# Altium PCB PCB2.PcbDoc
Units mm, origin at the board's own origin, x right, y up, seen from the top; angles counter-clockwise.
Board outline 90 x 120 mm, 2 copper layers (Top Layer, Bottom Layer), stack 1.6 mm thick; 37 components, 27 nets, 115 pads, 67 vias.
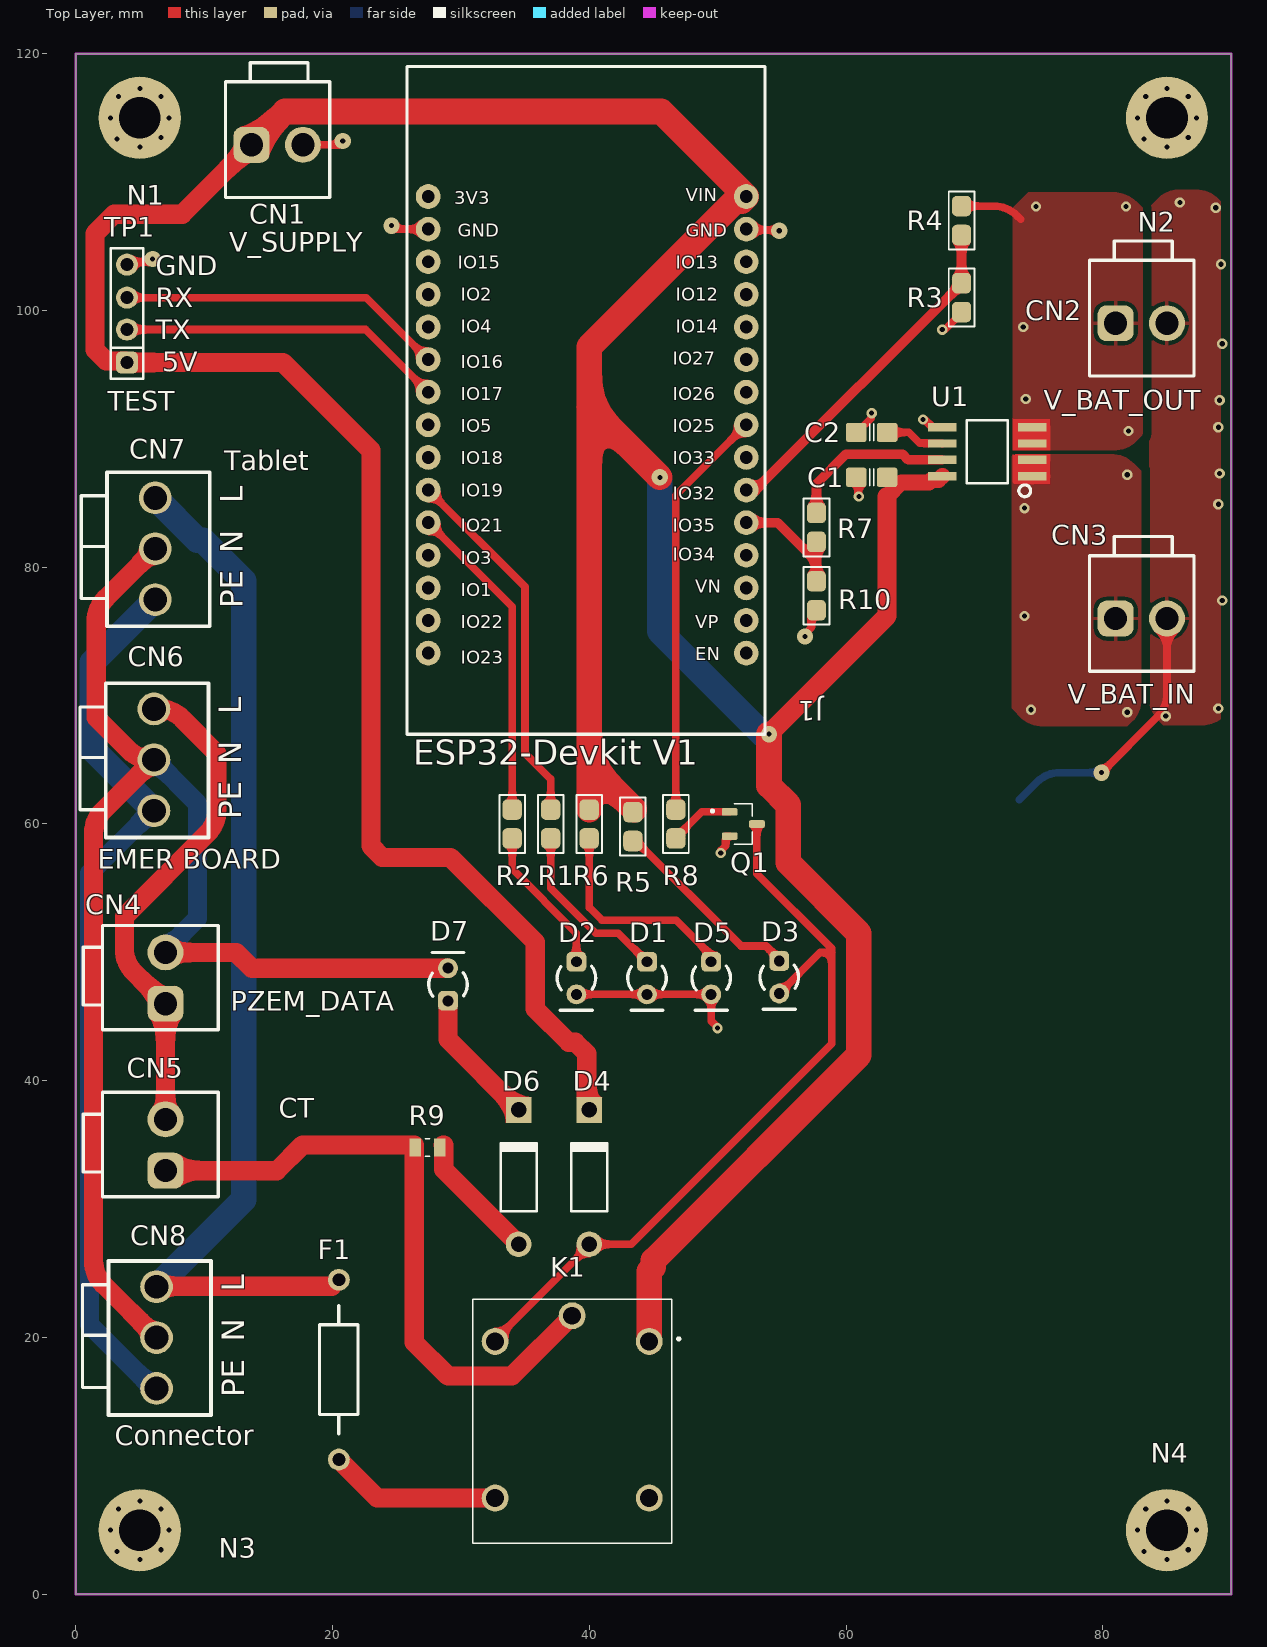
[diagram p0: Top Layer view]
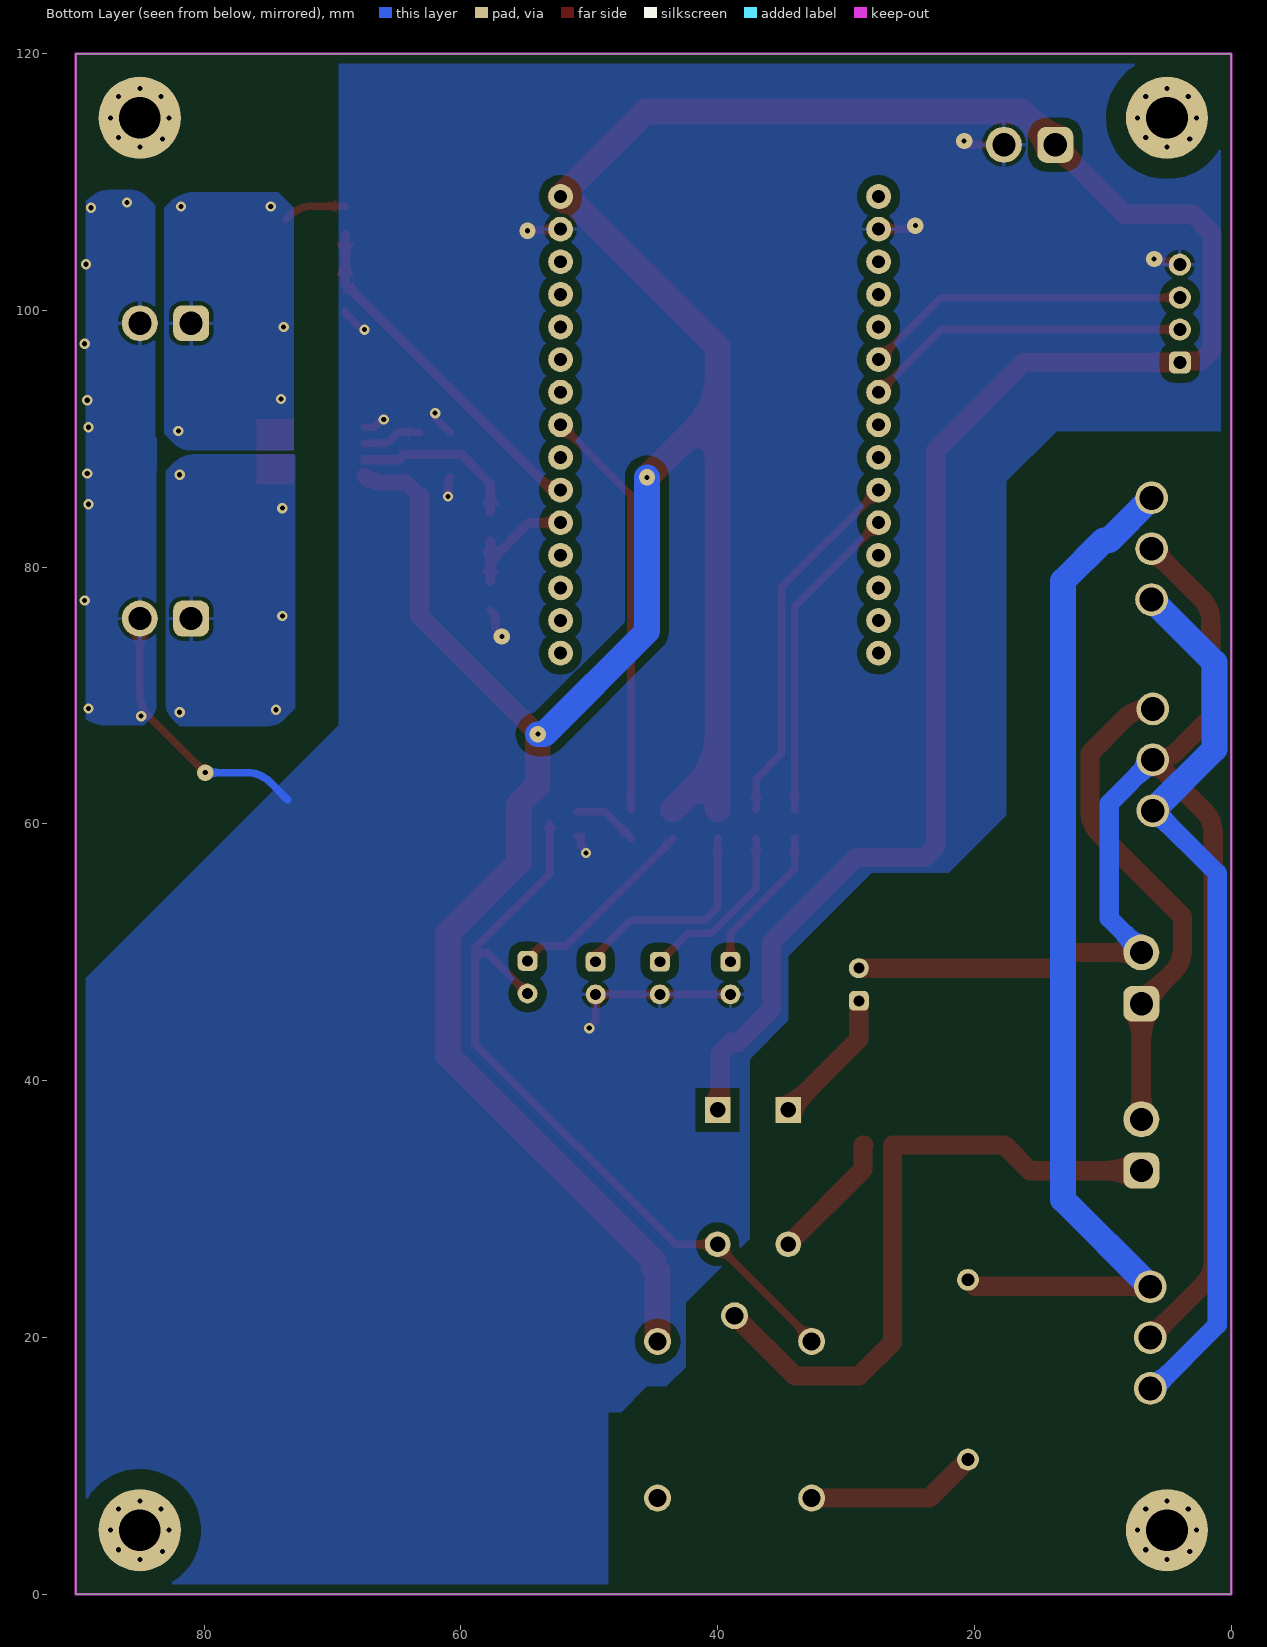
[diagram p1: Bottom Layer view, seen from below]

## Layer stack, top to bottom
Top Solder: solder mask 0.015, Solder Resist, Dk 3.5
Top Layer: signal copper 0.0356
Dielectric 1: dielectric 1.529, FR-4, Dk 4.8
Bottom Layer: signal copper 0.0356
Bottom Solder: solder mask 0.015, Solder Resist, Dk 3.5

## Board outline
0,0 0,120 90,120 90,0

## Design rules (kind name [scope] priority, off if disabled: settings)
BoardOutlineClearance [All] p1: gap=0.2 ignorepadtopadclearanceinfootprint=FALSE except(0.4: Arc-SplitBarrior Arc-SplitContinuation Track-SplitBarrior Track-SplitContinuation SMDPad-SplitBarrior SMDPad-SplitContinuation THPad-SplitBarrior THPad-SplitContinuation Via-SplitBarrior Via-SplitContinuation Fill-SplitBarrior Fill-SplitContinuation Poly-SplitBarrior Poly-SplitContinuation Region-SplitBarrior Region-SplitContinuation Text-SplitBarrior Text-SplitContinuation)
Clearance PolygonGND [InNet('GND')and not (IsVia or IsPad or IsTrack or IsArc)] p1: gap=0.7 ignorepadtopadclearanceinfootprint=FALSE except(0: Arc-Hole Track-Hole SMDPad-Hole THPad-Hole Via-Hole Fill-Hole Poly-Hole Region-Hole Text-Hole)
Clearance PadClearance [IsPad] p2: gap=0.2 ignorepadtopadclearanceinfootprint=FALSE except(0: Arc-Hole Track-Hole SMDPad-Hole THPad-Hole Via-Hole Fill-Hole Poly-Hole Region-Hole Text-Hole)
Clearance [All] p3: gap=0.2 ignorepadtopadclearanceinfootprint=FALSE except(0: Arc-Hole Track-Hole SMDPad-Hole THPad-Hole Via-Hole Fill-Hole Poly-Hole Region-Hole Text-Hole)
ComponentClearance [All] p1: gap=0.025 collisioncheckmode=3 verticalgap=0.1 showdistances=FALSE
Height [All] p1: minheight=0 maxheight=300 prefheight=12.7
HoleSize [All] p1: absolutevalues=TRUE maxlimit=6.3 minlimit=0.2 maxpercent=80.000 minpercent=20.000
MinimumAnnularRing [All] p1: minimumring=0.076
MinimumSolderMaskSliver [All] p1: minsoldermaskwidth=0.1
PolygonConnect ViaConnect [IsVia] p1: connectstyle=Direct reliefconductorwidth=0.254 reliefentries=4 polygonreliefangle="90 Angle" airgapwidth=0.254
PolygonConnect [All] p2: connectstyle=Relief reliefconductorwidth=0.3 reliefentries=4 polygonreliefangle="90 Angle" airgapwidth=0.3
RoutingVias [All] p1: holewidth=0.4 width=0.8 viastyle="Through Hole" minholewidth=0.3 minwidth=0.5 maxholewidth=0.711 maxwidth=1.27
SilkToSilkClearance [All] p1: silktosilkclearance=0.1
SilkToSolderMaskClearance [IsPad] p1: minsilkscreentomaskgap=0.1 clearancetoexposedcopper=TRUE
SolderMaskExpansion "Via Tenting" [IsVia] p1: expansion=-1 istentingtop=TRUE
SolderMaskExpansion [All] p2: expansion=0 istentingtop=FALSE
Width [All] p1: maxlimit=2.54 minlimit=0.089 preferedwidth=0.381
24 further rules are at their usual default settings.

## Components (designator, comment, footprint, x,y, rotation, side; value= is the part's Value field where it differs from the comment)
C1 "100n" CAPC2012X135N 62,87 r0 top
C2 "100n" CAPC2012X135N 62,90.5 r180 top
CN1 "V_SUPPLY" "Header 2 pin molex" 13.7,112.9 r0 top
CN2 "V_BAT_OUT" "Header 2 pin molex" 81,99 r0 top
CN3 "V_BAT_IN" "Header 2 pin molex" 81,76 r0 top
CN4 "PZEM_DATA" "Header 2 pin molex" 7,46 r90 top
CN5 "CT" "Header 2 pin molex" 7,33 r90 top
CN6 "EMER BOARD" "CON 3P 3.8mm" 6.1,68.96 r270 top
CN7 "Tablet" "CON 3P 3.8mm" 6.2,85.4 r270 top
CN8 "Connector" "CON 3P 3.8mm" 6.3,23.96 r270 top
D1 "LED" "LED GREEN" 44.5,48 r180 top
D2 "LED" "LED GREEN" 39,48 r180 top
D3 "LED" "LED GREEN" 54.8,48.07 r180 top
D4 "Diode 1N4007" DO-41 40,32.5 r90 top
D5 "LED" "LED GREEN" 49.5,48 r180 top
D6 "Diode 1N4007" DO-41 34.5,32.5 r90 top
D7 "LED_AC" "LED ORANGE" 29,47.5 r0 top
F1 "36FG(L)R" "Micro Fuse - L14mm" 20.5,17.5 r270 top value="1A, 250Vac"
J1 "ESP32DEVKITV1" ESP32-DEVKITV1_3D 41,86 r270 top locked
K1 "HRS4-S_DC6V" HRS4SDC5V 39,13.5 r270 top
N1 "M3" "M3 hole" 5,115 r0 top
N2 "M3" "M3 hole" 85,115 r0 top
N3 "M3" "M3 hole" 5,5 r0 top
N4 "M3" "M3 hole" 85,5 r0 top
Q1 "MMBT2222ALT1G" SOT95P237X111-3N 52,60 r0 top
R1 "330R" "0805 Modificado" 37,60 r270 top
R2 "330R" "0805 MODIFICADO" 34,60 r270 top
R3 "7K5" "0805 MODIFICADO" 69,101 r270 top
R4 "30K" "0805 MODIFICADO" 69,107 r270 top
R5 "330R" "0805 MODIFICADO" 43.4,59.8 r270 top
R6 "1K" "0805 Modificado" 40,60 r270 top
R7 "1K" "0805 Modificado" 57.7,83.1 r90 top
R8 "5k" "0805 MODIFICADO" 46.75,60 r270 top
R9 "56k" RESC2012X60N 27.4,34.8 r0 top
R10 "2K" "0805 Modificado" 57.7,77.775 r90 top
TP1 "TEST" "1x4P Test PIN" 4,98.485 r90 top
U1 "ACS712ELCTR-05B-T" SOIC127P600X175-8N 71,89 r180 top

## Footprints (in the part's own frame and the unit in brackets; to place one, negate y for a bottom-side part, rotate by r counter-clockwise, add the part's x,y. Pads: shape width x height; smd on the part's side, far side on the other; paste and mask are expansions set on the pad)
"1x4P Test PIN" [mm] "Connector Header, Single-row 4-position, 0.100\" pitch"
  rrect50% 1.72x1.72 hole 1.02: 1(-2.54,0)
  round 1.72 hole 1.02: 2(0.025,0) 3(2.515,0) 4(5.08,0)
  silkscreen extent -3.81,-1.27 6.35,1.27, body extent -3.69,-1.15 6.23,1.15, height 5
"0805 Modificado" [mm] "Chip Resistor, Empaque 0805"
  rrect50% 1.6x1.5 smd: 1(-1.125,0) 2(1.125,0)
  silkscreen extent -2.25,-1 2.25,1, body extent -1,-0.62 1,0.62, height 0.78
"0805 MODIFICADO" [mm] "Chip Resistor, Empaque 0805"
  rrect50% 1.6x1.5 smd: 1(-1.125,0) 2(1.125,0)
  silkscreen extent -2.25,-1 2.25,1, body extent -1,-0.62 1,0.62, height 0.78
CAPC2012X135N [mm] "Chip Capacitor, Body 2.0x1.2mm, EIA 0805, IPC Medium Density"
  round 0.254 on Mech15: 0(0,0)
  rrect25% 1.6x1.5 smd: 1(-1.2,0) 2(1.2,0)
  Top Layer pour cut-out: -0.675,0.7 -0.475,0.9 0.475,0.9 0.675,0.7 0.675,-0.7 0.475,-0.9 -0.475,-0.9 -0.675,-0.7
  silkscreen extent -0.15,-0.65 0.15,0.65, body extent -1.1,-0.72 1.1,0.73, height 1.34
"CON 3P 3.8mm" [mm]
  round 2.55 hole 1.85: 1(0,0) 2(3.96,0)
  round 2.55 hole 1.85 copper offset 0,0: 3(7.92,0.001)
  silkscreen extent -2,-5.76 10,4.25, body extent -1.86,-5.5 9.9,4, height 14.4
DO-41 [mm] "Diode, Axial; Body 5.2 x 2.7 mm (LxDia. max), Lead Dia. 0.86 mm (max)"
  round 2 hole 1.2: 1(-5.23,0)
  rect 2x2 hole 1.2: 2(5.23,0)
  silkscreen extent -2.65,-1.4 2.75,1.4, body extent -5.51,-1.34 5.51,1.4, height 2.73
ESP32-DEVKITV1_3D [mm]
  round 1.93 hole 1: 1(-22.87,-13.54) 2(-20.33,-13.54) 3(-17.79,-13.54) 4(-15.25,-13.54) 5(-12.71,-13.54) 6(-10.17,-13.54) 7(-7.63,-13.54) 8(-5.09,-13.54) 9(-2.55,-13.54) 10(-0.01,-13.54) 11(2.53,-13.54) 12(5.07,-13.54) 13(7.61,-13.54) 14(10.15,-13.54) 15(12.69,-13.54) 16(12.69,11.23) 17(10.15,11.23) 18(7.61,11.23) 19(5.07,11.23) 20(2.53,11.23) 21(-0.01,11.23) 22(-2.55,11.23) 23(-5.09,11.23) 24(-7.63,11.23) 25(-10.17,11.23) 26(-12.71,11.23) 27(-15.25,11.23) 28(-17.79,11.23) 29(-20.33,11.23) 30(-22.87,11.23)
  silkscreen extent -33,-15.2 19,12.7, body extent -33,-15.14 17.93,13.36, height 12.75
"Header 2 pin molex" [mm]
  rrect50% 2.8x2.8 hole 1.8: 1(0,0)
  round 2.8 hole 1.8: 2(4,0)
  silkscreen extent -2.03,-4.11 6.1,6.4, body extent -1.9,-3.95 5.9,5.55, height 14.4
HRS4SDC5V [mm]
  round 2.1 hole 1.4: 1(-6.2,5.675) 2(6,5.675) 3(6,-6.325) 4(-6.2,-6.325) 5(-8.2,-0.325)
  silkscreen extent -9.5,-8.08 9.5,8.07, body extent -9.5,-8.08 9.5,7.42, height 16.1
"LED GREEN" [mm]
  round 1.55 hole 0.85: 1(0,1.27)
  rrect50% 1.55x1.55 hole 0.85: 2(0,-1.27)
  silkscreen extent -1.5,-0.94 1.5,2.5, body extent -1.65,-1.66 1.65,1.64, height 7.01
"LED ORANGE" [mm]
  round 1.55 hole 0.85: 1(0,1.27)
  rrect50% 1.55x1.55 hole 0.85: 2(0,-1.27)
  silkscreen extent -1.5,-0.94 1.5,2.5, body extent -1.64,-1.66 1.65,1.55, height 6.48
"M3 hole" [mm]
  round 6.4 hole 3.25 mask+1.5: M(0,0)
  Top Layer pour cut-out: -0.132,4.78 -0.737,4.724 -1.295,4.597 -2.108,4.293 -2.818,3.885 -3.378,3.404 -3.834,2.869 -4.229,2.248 -4.497,1.616 -4.674,0.984 -4.769,0.305 -4.769,-0.353 -4.674,-0.965 -4.521,-1.575 -4.267,-2.134 -3.962,-2.692 -3.569,-3.175 -3.023,-3.721 -2.261,-4.229 -1.397,-4.572 -0.406,-4.75 0.457,-4.75 1.372,-4.572 2.248,-4.229 3.01,-3.721 3.556,-3.175 4.013,-2.591 4.42,-1.803 4.674,-0.965 4.775,-0.076 4.724,0.787 4.42,1.854 3.81,2.896 3.048,3.708 2.159,4.293 1.092,4.648
  Bottom Layer pour cut-out: -0.132,4.78 -0.737,4.724 -1.295,4.597 -2.108,4.293 -2.818,3.885 -3.378,3.404 -3.834,2.869 -4.229,2.248 -4.497,1.616 -4.674,0.984 -4.769,0.305 -4.769,-0.353 -4.674,-0.965 -4.521,-1.575 -4.267,-2.134 -3.962,-2.692 -3.569,-3.175 -3.023,-3.721 -2.261,-4.229 -1.397,-4.572 -0.406,-4.75 0.457,-4.75 1.372,-4.572 2.248,-4.229 3.01,-3.721 3.556,-3.175 4.013,-2.591 4.42,-1.803 4.674,-0.965 4.775,-0.076 4.724,0.787 4.42,1.854 3.81,2.896 3.048,3.708 2.159,4.293 1.092,4.648
  body extent -2.81,-2.8 2.79,2.8, height 4.92
"Micro Fuse - L14mm" [mm]
  round 1.7 hole 1: 1(-7,0) 2(7,0)
  silkscreen extent -5,-1.5 5,1.5, body extent -6.8,-1.9 6.8,1.9, height 3.9
RESC2012X60N [mm]
  rect 0.92x1.38 smd: 1(-0.955,0) 2(0.955,0)
  silkscreen extent -0.17,-0.68 0.17,0.68
SOIC127P600X175-8N [mm]
  rect 2.2x0.65 smd: 1(-3.5,1.905) 2(-3.5,0.635) 3(-3.5,-0.635) 4(-3.5,-1.905) 5(3.5,-1.905) 6(3.5,-0.635) 7(3.5,0.635) 8(3.5,1.905)
  silkscreen extent -3.38,-2.45 1.6,3.51, body extent -3,-2.45 3,2.45, height 1.75
SOT95P237X111-3N [mm]
  rrect50% 1.23x0.6 smd: 1(-1.06,0.95) 2(-1.06,-0.95) 3(1.06,0)
  silkscreen extent -2.5,-1.56 0.7,1.56, body extent -1.2,-1.45 1.2,1.45, height 0.91

## Part data
CN1 CN2 CN3 CN4 CN5: library part "Header LIGHT", "Connector 3.96MM 02 PIN WAFER STRAIGHTPIN (MALE)"
CN6 CN7 CN8: library part "Con 112002ST/RH 3.96mm 2P V-PLUG_1", "Connector 3.9mm. 3PINS WAFER STRAIGHT PIN (MALE)", Manufacturer=GTK, MPN=112002ST/RH, RMPN=RMELCCNT006, ComponentLink1Description="ES LINK", ComponentLink1URL=https://www.es.co.th/detail.asp?Prod=000709322, ESPN=0007-0932-2, M DESC="WAFER Connector 2 Pins,Pitch 3.96mm, Straight Type", RM DESC="Connector 3.9mm. 2PINS WAFER STRAIGHT PIN (MALE)"
D1 D2 D3 D5: library part "LED GREEN", "LED Lamp Round 5 mm, 50 mcd,Green Color Green Diffused Lens"
D4 D6: library part "Diode 1N4001", "1 Amp General Purpose Rectifier", Code_JEDEC=DO-204-AL, ComponentLink1Description="Manufacturer Link", ComponentLink1URL=http://www.fairchildsemi.com/, ComponentLink2Description=Datasheet, ComponentLink2URL=http://www.fairchildsemi.com/ds/1N%2F1N4001.pdf, DatasheetVersion=1998, LatestRevisionDate=17-Jul-2002, LatestRevisionNote="Re-released for DXP Platform.", PackageDescription="Diode, Axial; Body 5.2 x 2.7 mm (LxDia. max), Lead Dia. 0.86 mm (max)", PackageReference=DO-41, PackageVersion=Aug-1999, Published=8-Jun-2000, Publisher="Altium Limited"
D7: library part "LED ORANGE", "LED ORANGE for AC-signal display"
F1: library part "Fuse 36FG(L)R 1A On pcb", "Fuse Microfuse, 1A/250Vac, Fast Acting (Normal Blow) P/N : 36FG(L)R (SLEEK)", Manufacturer=SLEEK, RMPN=RMELCFUSA001, ComponentLink1Description="Link ES", ComponentLink1URL=https://www.es.co.th/detail.asp?prod=056200010, ComponentLink2Description=Datasheet, ComponentLink2URL=https://www.es.co.th/Schemetic/PDF/36FG-SLEEK.PDF, ESPN=0562-0001-0, MPN=36FG(L)R, Published=14-May-2014, Publisher="Cynetik Group", Revised="Zion Blue", RM DESC="Fuse หางหนู Microfuse, 1A/250Vac, Fast Acting (Normal Blow) P/N : 36FG(L)R (SLEEK)"
J1: "Dual core, Wi-Fi: 2.4 GHz up to 150 Mbits/s,BLE (Bluetooth Low Energy) and legacy Bluetooth, 32 bits, Up to 240 MHz", Package=Package, Availability=Unavailable, Check_prices=https://www.snapeda.com/parts/ESP32%20DEVKIT%20V1/Do%20it/view-part/5659245/?ref=eda, MF="Do it", MP="ESP32 DEVKIT V1", Price=None, SnapEDA_Link=https://www.snapeda.com/parts/ESP32%20DEVKIT%20V1/Do%20it/view-part/5659245/?ref=snap
K1: library part HRS4-S_DC5V, "Relay or Contactor", Manufacturer_Name=MULTICOMP, Manufacturer_Part_Number="HRS4-S DC5V", Datasheet Link=http://www.farnell.com/datasheets/1306711.pdf, Height=16mm
N1 N2 N3 N4: library part "M3 hole", "น็อต JT หัวร่ม สกรูมิลสี่แฉก M3x6", RMPN=RMRMANUTCJTZ011
Q1: "Bipolar (BJT) Transistor NPN 40 V 600 mA 300MHz 225 mW Surface Mount SOT-23-3 (TO-236)", Package="SOT-23-3 ON Semiconductor", Availability="In Stock", Check_prices=https://www.snapeda.com/parts/MMBT2222ALT1G/Onsemi/view-part/?ref=eda, MF="ON Semiconductor", MP=MMBT2222ALT1G, Price=None, Purchase-URL=https://pricing.snapeda.com/search/part/MMBT2222ALT1G/?ref=eda, SnapEDA_Link=https://www.snapeda.com/parts/MMBT2222ALT1G/Onsemi/view-part/?ref=snap
R1 R2 R5: library part "Resistor SMD 330R +/- 1% (CHIP)", "'RES SMD 330 OHM 5% 1/8W 0805/0805W8F3300T5E", RMPN=RMELCRSTS010
R3 R4 R9: library part 5k
R6 R7: library part "Resistor 0805 SMD 1K OHM +/- 1% (CHIP)", "'RES SMD 1K OHM 1% 1/8W 0805/0805W8F1001T5E"
R10: library part "Resistor 0805 SMD 4K7 OHM +/- 1% (CHIP)", "'RES SMD 4.7K OHM 1% 1/8W 0805/0805W8F4701T5E"
TP1: library part "PIN Header 1X4", "Connector Pin Header 4 Pins,Pitch 2.54mm. P/N : PHSS04G10/RH (GTK)", ComponentLink1Description="Link ES", ComponentLink1URL=https://www.es.co.th/detail.asp?Prod=000703471, ComponentLink2Description=Datasheet, ComponentLink2URL=https://www.es.co.th/Schemetic/PDF/PHSSXXG10.PDF
U1: "Current Sensor 5A 1 Channel Hall Effect, Open Loop Bidirectional 8-SOIC (0.154, 3.90mm Width)", Package="SOIC-8 Allegro MicroSystems LLC", Availability="In Stock", Check_prices=https://www.snapeda.com/parts/ACS712ELCTR-05B-T/Allegro+MicroSystems+LLC/view-part/?ref=eda, MF="Allegro MicroSystems LLC", MP=ACS712ELCTR-05B-T, Price=None, Purchase-URL=https://pricing.snapeda.com/search/part/ACS712ELCTR-05B-T/?ref=eda, SnapEDA_Link=https://www.snapeda.com/parts/ACS712ELCTR-05B-T/Allegro+MicroSystems+LLC/view-part/?ref=snap

## Via types
v1: diameter 0.8, hole 0.4, Top Layer to Bottom Layer, 32 vias
v2: diameter 0.8, hole 0.4, Top Layer to Bottom Layer, tented both sides, 27 vias
v3: diameter 1.27, hole 0.4, Top Layer to Bottom Layer, tented both sides, 8 vias

## Nets (pads, with @x,y where several pads share a name; then routed paths per layer and width w, separated by ;. In a path a pad name is that pad's centre, name@x,y a point inside that pad or via, vN(x,y) a via of type N, cw(c..) or ccw(c..) an arc to the next point about the centre after c; other vN are vias at no path point)
5: C1.2 CN1.1 D4.2 J1.30 K1.1 R5.1 R6.1 TP1.1 U1.8 | length 326.9
  Top Layer w1.25: D4.2@39.8,38.3 40,38.1 D4.2 ; 63.2,85.5 64.304,86.604 66.473,86.604 66.664,86.795 67.2,86.795 U1.8
  Top Layer w1.5: CN1.1 8.3,107.5 3,107.5 1.5,106 1.5,96.934 2.379,96.055 3.89,96.055 TP1.1 16.155,95.945 23,89.1 23,58.279 23.879,57.4 29.2,57.4 35.8,50.8 35.8,45.6 38.4,43 38.921,43 39.8,42.121 D4.2@39.8,38.3 ; v3(54,67) 63.2,76.2 63.2,85.5
  Top Layer w2: CN1.1 16.3,115.5 45.6,115.5 J1.30 51.855,108.495 51.333,108.495 40,97.162 40,92.5 ; R6.1 40,64.625 ; R5.1@43.5,61.125 40,64.625 ; K1.1 44.675,25.175 45,25.5 45,26 61,42 61,51.5 55.5,57 55.5,61.5 54,63 v3(54,67) ; v3(45.5,87) 40,92.5 ; 40,64.625 40,92.5
  Bottom Layer w2: v3(45.5,87) 45.5,75 53.5,67 v3(54,67)
"AC LINE INPUT": F1.2 K1.3 | length 13.4
  Top Layer w1.5: F1.2 23.5,7.5 K1.3
"AC LINE OUTPUT": CN4.1 CN5.2 CN6.1 | length 38.8
  Top Layer w1.5: CN6.1 6.488,68.96 cw(c6.488,66.42) 8.284,68.216 11,65.5 11,61.052 cw(c8.46,61.052) 10.256,59.256 3.8,52.8 3.8,50.252 ccw(c6.34,50.252) 4.544,48.456 CN4.1 CN5.2
"AC NEUTRAL INPUT": CN4.2 CN6.2 CN7.2 CN8.2 D7.1 | length 109.4
  Top Layer w1.5: CN7.2 2.344,77.584 ccw(c4.14,75.788) 1.6,75.788 1.6,68.3 4.156,65.744 ccw(c5.952,67.54) 5.952,65 CN6.2 2.107,61.007 ccw(c3.814,59.3) 1.4,59.3 1.4,25.952 ccw(c3.94,25.952) 2.144,24.156 CN8.2 ; CN4.2 12.5,50 13.73,48.77 D7.1
  Bottom Layer w1.5: CN6.2 9.5,61.6 9.5,52.662 7,50.162 CN4.2
CURRENT_SENSOR: J1.20 R7.1 R10.2 | length 10.1
  Top Layer w0.75: J1.20@52.4,83.3 J1.20 54.68,83.47 57.7,80.45 ; R10.2 57.7,80.45 ; R7.1@57.7,82 57.7,80.45
Filter: C2.1 U1.6 | length 4.7
  Top Layer w0.596: C2.1 64.894,90.5 65.732,89.662 67.473,89.662 U1.6
GND: C1.1 C2.2 CN1.2 CN2.2 CN3.2 D1.1 D2.1 D5.1 J1.2 J1.29 Q1.2 R3.2 R10.1 TP1.4 U1.5 | length 57.3
  Top Layer w0.596: TP1.4 4.215,103.78 5.598,103.78 5.818,104 v3(6,104) ; CN1.2 20.318,112.9 20.618,113.2 v3(20.8,113.2) ; v3(24.6,106.6) 24.782,106.6 25.052,106.33 J1.2 ; D2.1 D1.1 D5.1 49.5,44.655 50,44.155 v2(50,44.1) ; v2(50.25,57.75) 50.25,57.932 50.623,58.305 50.623,59.048 50.625,59.05 Q1.2 ; J1.29 52.295,106.265 54.735,106.265 v3(54.8,106.2) ; v3(56.8,74.6) 56.8,74.782 57.296,75.278 57.296,76.246 R10.1 ; C2.2 60.85,90.5 61.961,91.611 61.961,91.961 v2(62,92) ; C1.1@60.85,87 C1.1 60.961,86.839 60.961,85.539 v2(61,85.5) v2@61,85.445 ; v2(66,91.5) 66.039,91.461 66.169,91.461 66.725,90.905 U1.5 ; v2(67.5,98.5) 67.539,98.539 67.714,98.539 69,99.825 R3.2 ; v3(79.9,64) 84.256,68.356 ccw(c82.46,70.152) 85,70.152 CN3.2
  Bottom Layer w0.596: 73.5,61.9 74.856,63.256 cw(c76.652,61.46) 76.652,64 v3(79.9,64)
  other v2: 84.9,68.4 89,69 89.3,77.4 89,84.9 89.1,87.3 89,90.9 89.1,93 89.3,97.4 89.2,103.6 88.8,108 86,108.4
IP+: CN3.1 U1.1 U1.2
  other v2: 81.9,68.7 74.4,68.9 73.9,76.2 73.9,84.6 81.9,87.2
IP-: CN2.1 R4.1 U1.3 U1.4 | length 4.9
  Top Layer w0.596: R4.1 71.523,108.125 cw(c71.523,105.585) 73.319,107.381 73.6,107.1
  other v2: 82,90.6 74,93.1 73.8,98.7 74.8,108.1 81.8,108.1
"IV LED": J1.11 R2.1 | length 25.1
  Top Layer w0.596: J1.11 34,76.93 R2.1
NetCN5_1: CN5.1 K1.5 R9.1 | length 50.9
  Top Layer w1.5: CN5.1 15.663,33 17.663,35 26.375,35 26.375,19.625 29,17 33.975,17 K1.5
NetCN7_1: CN7.1 CN8.1 F1.1 | length 82.1
  Top Layer w1.5: CN8.1@6,24 19.946,24 20.446,24.5 F1.1
  Bottom Layer w2: CN7.1 9.488,82.112 9.917,82.112 13.1,78.928 13.1,30.76 CN8.1
NetD1_2: D1.2 R1.2 | length 13.7
  Top Layer w0.596: R1.2 37,55 40.5,51.5 42.27,51.5 D1.2
NetD2_2: D2.2 R2.2 | length 11.7
  Top Layer w0.596: R2.2 34,56.5 39,51.5 D2.2
NetD3_1: D3.1 D4.1 K1.4 Q1.3 | length 60.9
  Top Layer w0.596: K1.4 32.675,19.823 40,27.147 D4.1 43.27,27.27 58.898,42.898 58.898,50 ; Q1.3 53.06,56.141 58.898,50.303 58.898,50 ; D3.1 58,50 58.898,50
NetD3_2: D3.2 R5.2 | length 15.5
  Top Layer w0.596: R5.2@43.5,58.875 43.5,58.825 51.825,50.5 53.77,50.5 D3.2@55,49.27
NetD5_2: D5.2 R6.2 | length 16.4
  Top Layer w0.596: R6.2 40,53.5 41,52.5 46.77,52.5 D5.2@49.5,49.77
NetD6_1: D6.1 R9.2 | length 10.2
  Top Layer w1.5: R9.2@28.625,35 28.675,35 28.675,33.095 D6.1
NetD6_2: D6.2 D7.2 | length 10.8
  Top Layer w1.5: D7.2 29,43.23 D6.2
NetQ1_1: Q1.1 R8.2 | length 5.1
  Top Layer w0.596: R8.2 46.75,58.925 48.775,60.95 Q1.1
NetR7_2: R7.2 U1.7 | length 13.1
  Top Layer w0.75: R7.2@57.7,84.325 57.7,86.5 60,88.8 64.4,88.8 64.835,88.365 U1.7
PE: CN6.3 CN7.3 CN8.3 | length 69.5
  Bottom Layer w1.5: CN8.3@6.001,16.08 1.077,21.004 1.077,56.155 CN6.3@6.001,61.079
  Bottom Layer w2: CN6.3 1.3,65.841 1.3,72.578 CN7.3
RELAY_CONTROL: J1.23 R8.1 | length 32.3
  Top Layer w0.596: R8.1 46.75,85.61 J1.23
  Top Layer w1.25: J1.23 52.23,91.02 J1.23@52.25,91
RX_PZEM: J1.6 TP1.3 | length 25.5
  Top Layer w0.596: TP1.3 22.63,101 J1.6
TX_PZEM: J1.7 TP1.2 | length 25.5
  Top Layer w0.596: TP1.2 22.579,98.511 J1.7
  Top Layer w1.5: TP1.2@4,98.5 TP1.2
VOLTAGE_SENSOR: J1.21 R3.1 R4.2 | length 27.2
  Top Layer w0.75: J1.21 52.456,86.236 53.161,86.236 69,102.075 R3.1 R4.2
WIFI_LED: J1.10 R1.1 | length 28.8
  Top Layer w0.596: J1.10 35,78.47 35,65.5 37,63.5 R1.1
pads on no net: C1.0 C2.0 J1.1 J1.3 J1.4 J1.5 J1.8 J1.9 J1.12 J1.13 J1.14 J1.15 J1.16 J1.17 J1.18 J1.19 J1.22 J1.24 J1.25 J1.26 J1.27 J1.28 K1.2 N1.M N2.M N3.M N4.M
copper on no net:
  other v1: 5,2.714 85,2.714 3.222,3.349 83.222,3.349 6.651,3.476 86.651,3.476 2.714,5 7.286,5 82.714,5 87.286,5 3.349,6.651 6.651,6.651 83.349,6.651 86.651,6.651 5,7.286 85,7.286 5,112.714 85,112.714 3.222,113.349 83.222,113.349 6.651,113.476 86.651,113.476 2.714,115 7.286,115 82.714,115 87.286,115 3.349,116.651 6.651,116.651 83.349,116.651 86.651,116.651 5,117.286 85,117.286

## Polygon pours and split planes (outlines as drawn)
GND on Top Layer "GND_L01_P015" (solid, pour order 15): 83.6,69.852 ccw(c86.14,69.852) 84.344,68.056 84.7,67.7 87.748,67.7 ccw(c87.748,70.24) 89.544,68.444 89.8,68.7 89.8,107.9 89.044,108.656 ccw(c87.248,106.86) 87.248,109.4 85.8,109.4 ccw(c85.8,107.469) 84.434,108.834 83.6,108
IP- on Top Layer "IP-_L01_P008" (solid, pour order 8): 73,89.1 80.848,89.1 ccw(c80.848,91.64) 82.644,89.844 83,90.2 ccw(c82.759,90.441) 83.1,90.441 83.1,108 82.644,108.456 ccw(c80.848,106.66) 80.848,109.2 74.2,109.2 73,108
IP+ on Top Layer "IP+_L01_P009" (solid, pour order 9): 73,88.8 80.648,88.8 cw(c80.648,86.26) 82.444,88.056 83,87.5 83,69.752 cw(c80.46,69.752) 82.256,67.956 81.9,67.6 75.352,67.6 cw(c75.352,70.14) 73.556,68.344 72.9,69 72.9,88.559 cw(c73.241,88.559)
GND on Bottom Layer "GND_L02_P000" (solid, pour order 0): 0,119.8 0,90.6 13.6,90.6 17.5,86.7 17.5,60.696 22,56.196 28,56.196 34.5,49.696 34.5,44.696 37.5,41.696 37.5,27.696 42.5,22.696 42.5,17.696 44,16.196 45.5,16.196 47.5,14.196 48.5,14.196 48.5,0.196 89.2,0.196 89.2,47.996 69.5,67.696 69.5,119.8
GND on Bottom Layer "GND_L02_P016" (solid, pour order 16): 83.8,108.2 84.505,108.905 cw(c85.7,107.71) 85.7,109.4 87.248,109.4 cw(c87.248,106.86) 89.044,108.656 89.8,107.9 89.8,68.7 89.544,68.444 cw(c87.748,70.24) 87.748,67.7 84.7,67.7 84.195,68.205 cw(c85.39,69.4) 83.7,69.4 83.7,107.859 cw(c84.041,107.859) 83.8,108.1
IP+ on Bottom Layer "IP+_L02_P014" (solid, pour order 14): 73,88.8 80.648,88.8 cw(c80.648,86.26) 82.444,88.056 83,87.5 83,69.5 cw(c81.069,69.5) 82.434,68.134 81.9,67.6 75.1,67.6 cw(c75.1,69.531) 73.734,68.166 72.9,69 72.9,88.7
IP- on Bottom Layer "IP-_L02_P013" (solid, pour order 13): 74.2,109.2 80.848,109.2 cw(c80.848,106.66) 82.644,108.456 83.1,108 83.1,90.4 82.295,89.595 cw(c81.1,90.79) 81.1,89.1 73,89.1 73,108

## Keep-outs
Keep-Out Layer:
  the board outline again, w0.2

## Other copper
Top Layer:
  region net IP+: 73.1,88.735 cw(c73.257,88.577) 73.257,88.8 75.9,88.8 75.9,86.47 73.1,86.47 cw(c73.38,86.75) 72.984,86.75 72.984,88.774 73.006,88.774 cw(c73.006,88.641) 73.1,88.735
  region net IP-: 73,91.595 73,89.1 75.9,89.1 75.9,91.53 73.157,91.53 cw(c73.157,91.753)

## Silkscreen, mask and mechanical layers (free items; w line width, h text height)
Top Overlay:
  text "GND" at 6.254,102.754 h1.52
  text "RX" at 6.254,100.254 h1.52
  text "TX" at 6.254,97.754 h1.52
  text "5V" at 6.754,95.254 h1.52

## Text inside footprints (layer, text, board x,y; h text height)
CN6: Top Overlay "L" at 13.5,68.56 h3 r90; Top Overlay "N" at 13.5,64.66 h3 r90; Top Overlay "PE" at 13.5,60.36 h3 r90
CN7: Top Overlay "L" at 13.6,85 h3 r90; Top Overlay "N" at 13.6,81.1 h3 r90; Top Overlay "PE" at 13.6,76.8 h3 r90
CN8: Top Overlay "PE" at 13.7,15.36 h3 r90; Top Overlay "N" at 13.7,19.66 h3 r90; Top Overlay "L" at 13.7,23.56 h3 r90
J1: Top Overlay "3V3" at 29.5,108.25 h1.02; Top Overlay "GND" at 29.75,105.75 h1.02; Top Overlay "IO15" at 29.75,103.25 h1.02; Top Overlay "IO2" at 30,100.75 h1.02; Top Overlay "IO4" at 30,98.25 h1.02; Top Overlay "IO16" at 30,95.5 h1.02; Top Overlay "IO17" at 30,93 h1.02; Top Overlay "IO5" at 30,90.5 h1.02; Top Overlay "IO18" at 30,88 h1.02; Top Overlay "IO19" at 30,85.5 h1.02; Top Overlay "IO21" at 30,82.75 h1.02; Top Overlay "IO3" at 30,80.25 h1.02; Top Overlay "IO1" at 30,77.75 h1.02; Top Overlay "IO22" at 30,75.25 h1.02; Top Overlay "IO23" at 30,72.5 h1.02; Top Overlay "VIN" at 47.5,108.5 h1.02; Top Overlay "GND" at 47.5,105.75 h1.02; Top Overlay "IO13" at 46.75,103.25 h1.02; Top Overlay "IO12" at 46.75,100.75 h1.02; Top Overlay "IO14" at 46.75,98.25 h1.02; Top Overlay "IO27" at 46.5,95.75 h1.02; Top Overlay "IO26" at 46.5,93 h1.02; Top Overlay "IO25" at 46.5,90.5 h1.02; Top Overlay "IO33" at 46.5,88 h1.02; Top Overlay "IO32" at 46.5,85.25 h1.02; Top Overlay "IO35" at 46.5,82.75 h1.02; Top Overlay "IO34" at 46.5,80.5 h1.02; Top Overlay "VN" at 48.25,78 h1.02; Top Overlay "VP" at 48.25,75.25 h1.02; Top Overlay "EN" at 48.25,72.75 h1.02; Top Overlay "ESP32-Devkit V1" at 26.3,64.6 h1.93; Mechanical 13 "ESP32-DEVKITV1" at 47.23,118.79 h1.27 r180